# Altium PCB PCB_BoargV1_3.PcbDoc
Units mm, origin at the board's own origin, x right, y up, seen from the top; angles counter-clockwise.
Board outline 84.07 x 53 mm, 2 copper layers (Top Layer, Bottom Layer); 53 components, 52 nets, 250 pads, 38 vias.
Unrouted connection lines stored in the file: 1.
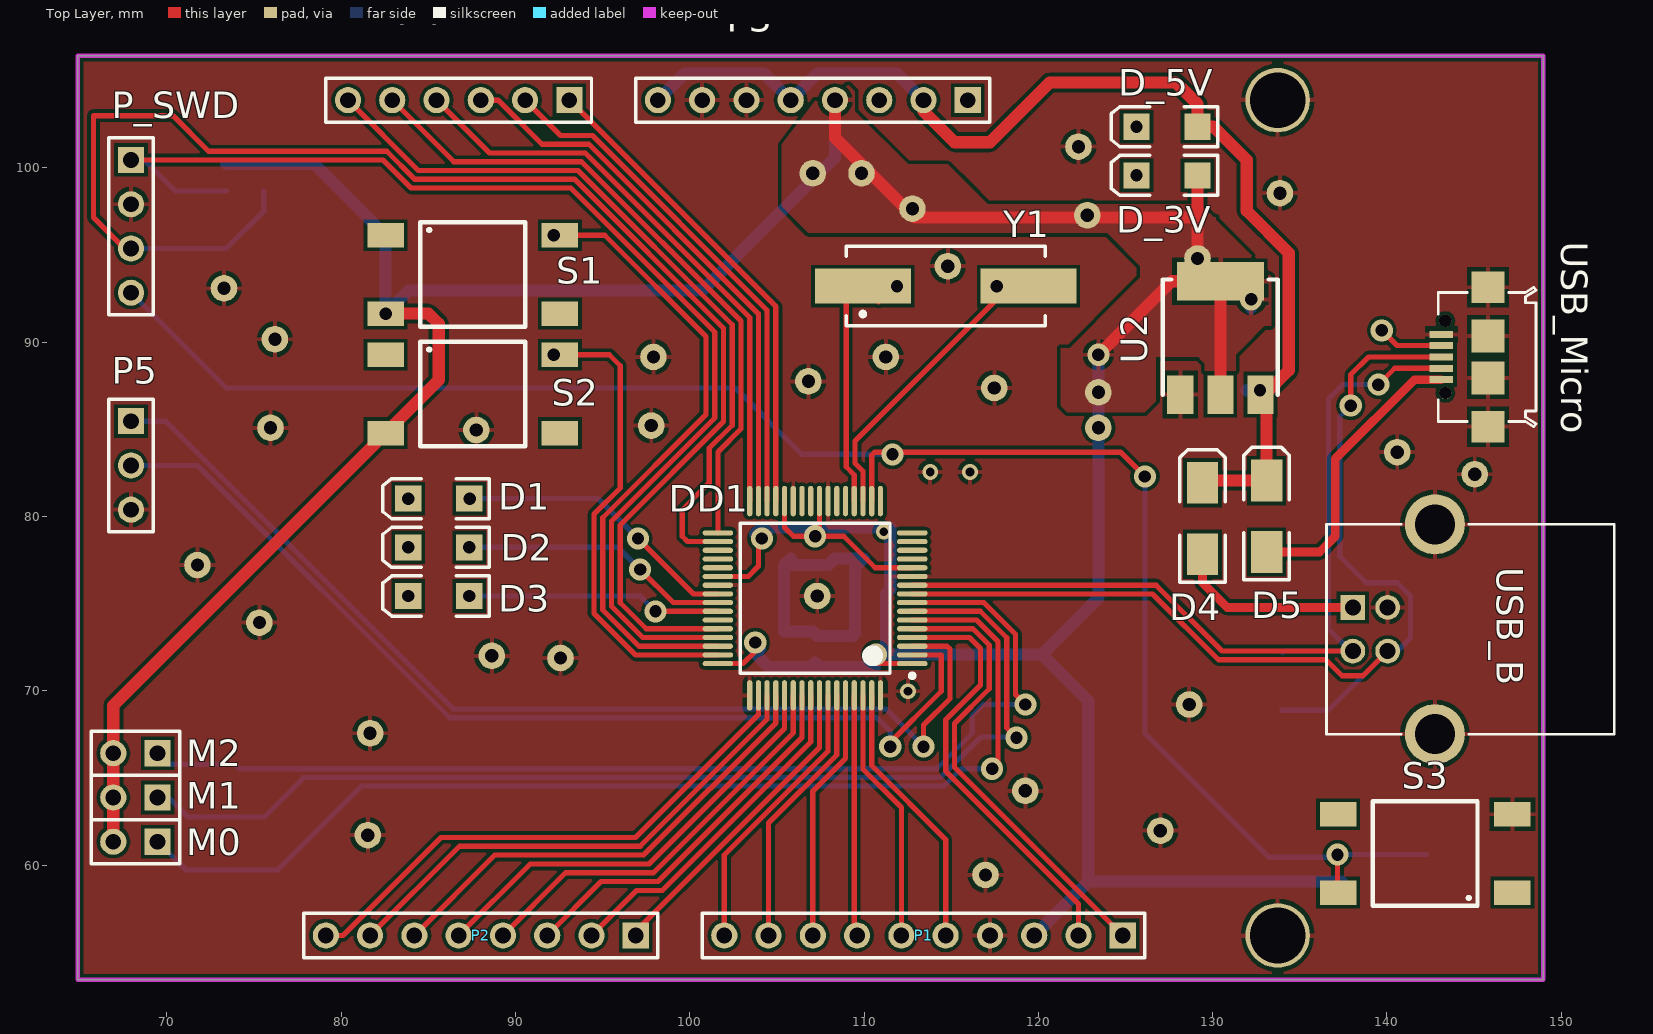
[diagram p0: Top Layer view]
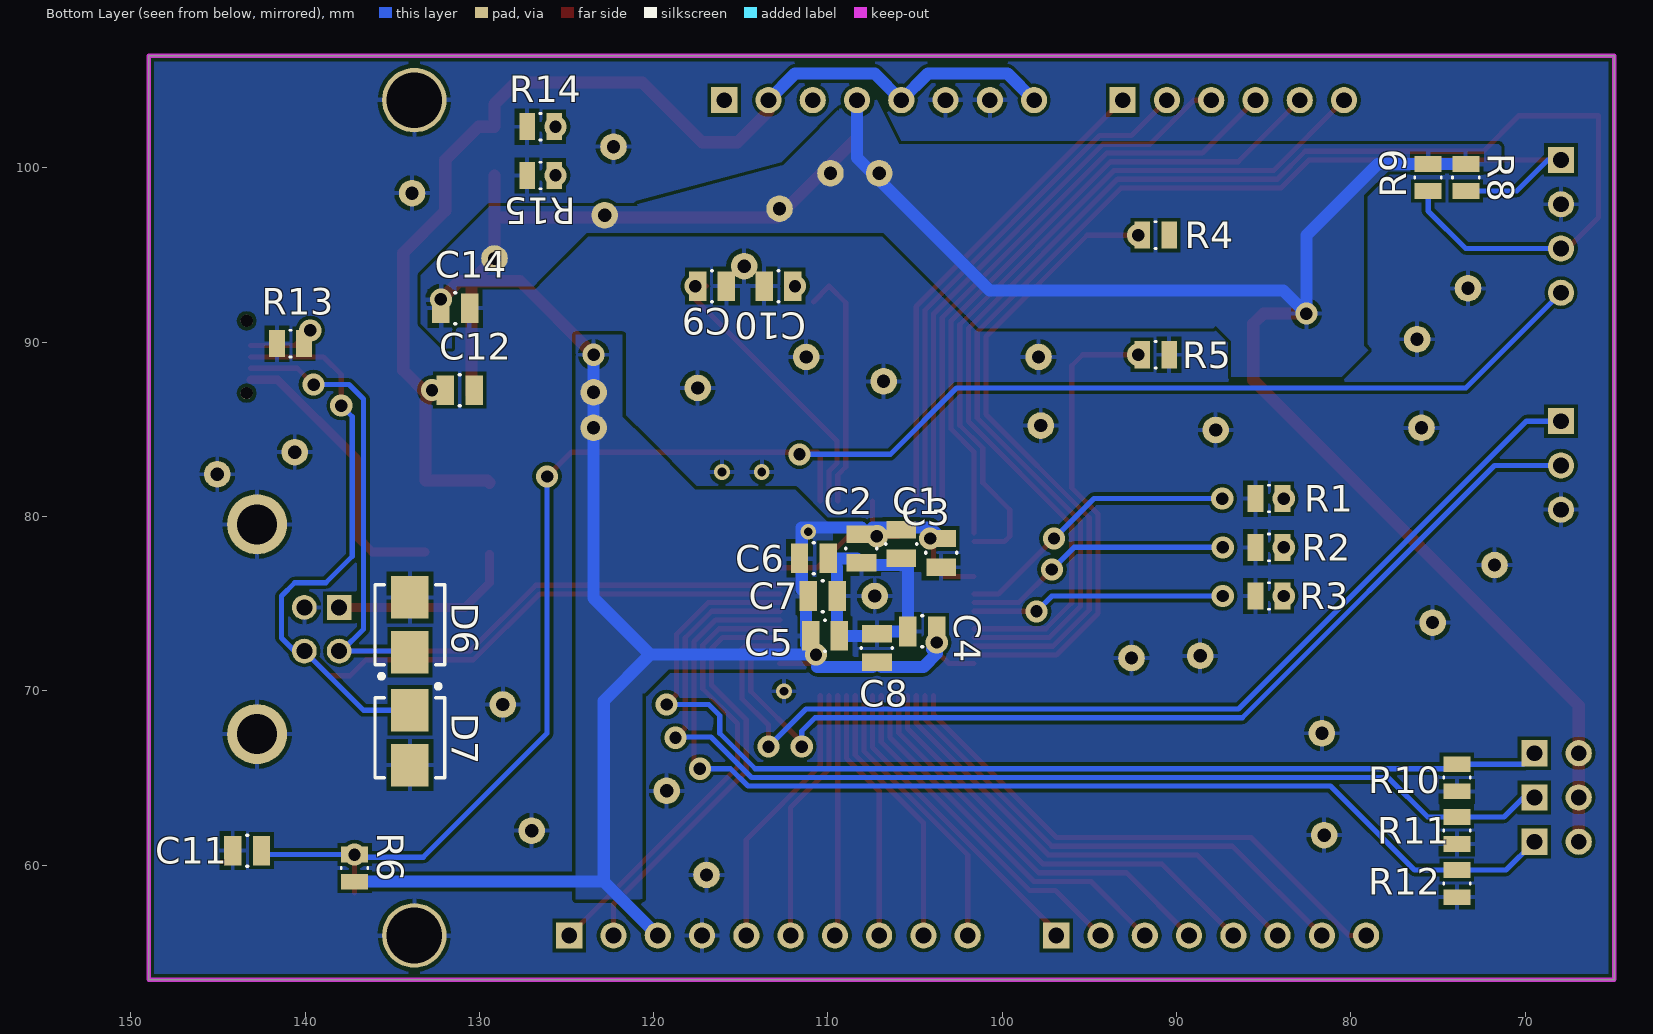
[diagram p1: Bottom Layer view, seen from below]
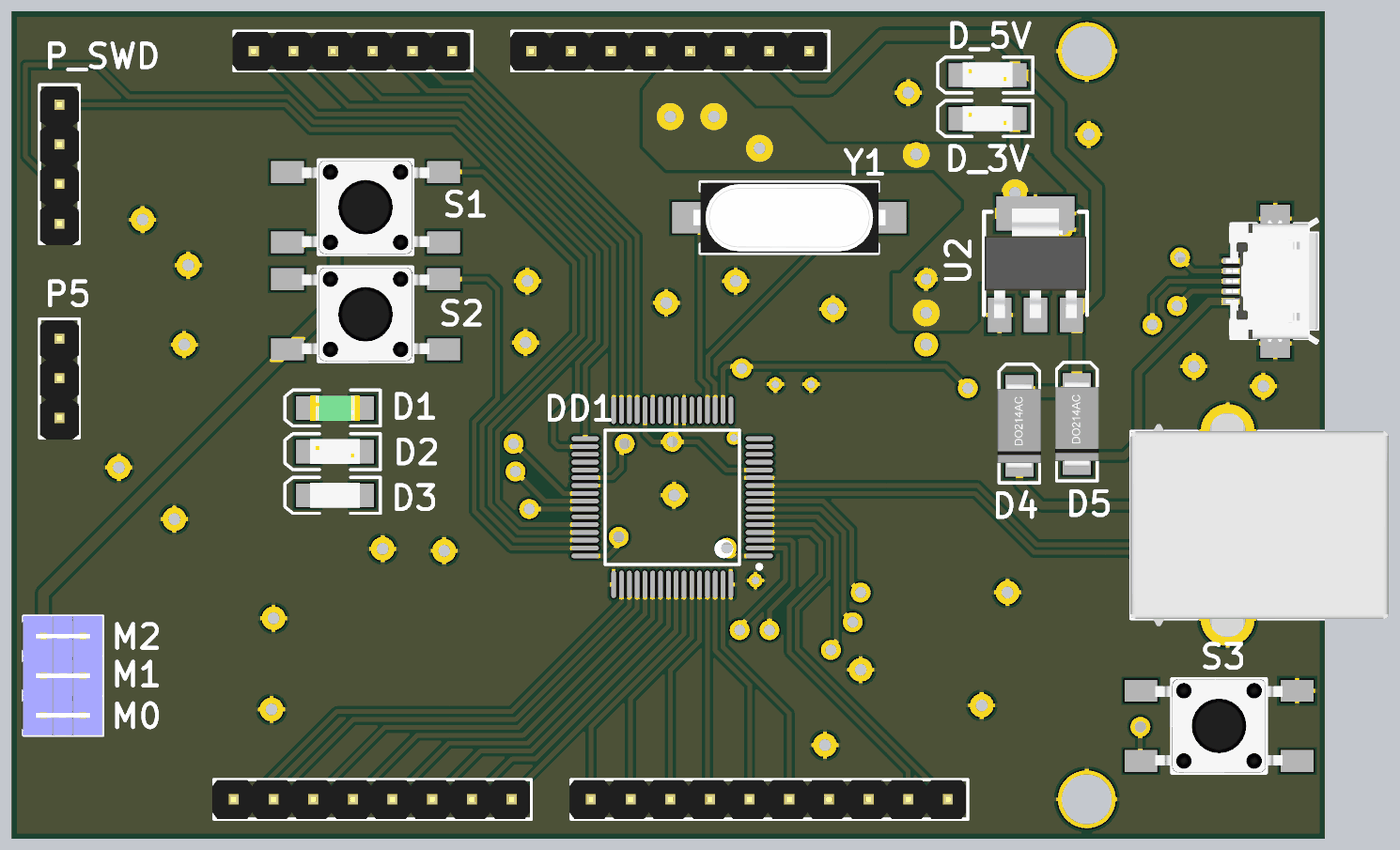
[diagram p2: 3D render of the assembled board from above, using the file's embedded part models]
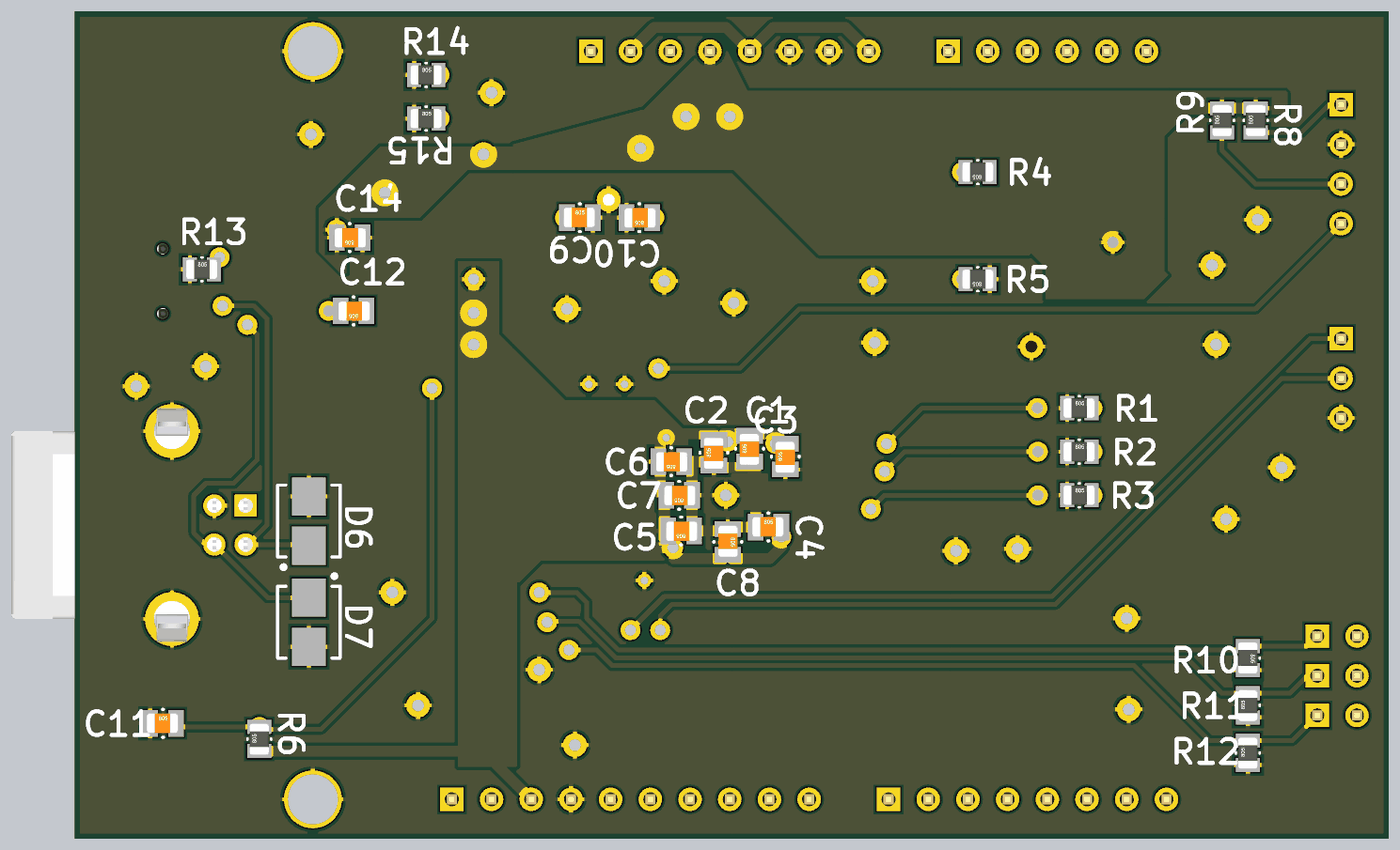
[diagram p3: 3D render of the assembled board from below, using the file's embedded part models]

## Layer stack, top to bottom
Top Solder: solder mask 0.0102, Solder Resist, Dk 3.5
Top Layer: signal copper 0.0356
Dielectric 1: dielectric 0.32, FR-4, Dk 4.8
Bottom Layer: signal copper 0.0356
Bottom Solder: solder mask 0.0102, Solder Resist, Dk 3.5

## Board outline
64.897,53.426 64.897,106.426 148.971,106.426 148.971,53.426

## Design rules (kind name [scope] priority, off if disabled: settings)
Clearance [All] p1: gap=0.2
PolygonConnect [All] p1: connectstyle=Relief reliefconductorwidth=0.254 reliefentries=4 polygonreliefangle="90 Angle" airgapwidth=0.254
RoutingVias [All] p1: holewidth=0.711 width=1.27 viastyle="Through Hole" minholewidth=0.711 minwidth=1.27 maxholewidth=0.711 maxwidth=1.27
SolderMaskExpansion [All] p1: expansion=0.102
Width Width_GND [InNet('GND')] p1: maxlimit=0.9 minlimit=0.254 preferedwidth=0.5
Width Width_3V [InNet('3.3V')] p2: maxlimit=0.7 minlimit=0.3 preferedwidth=0.5
Width Width_5V [InNet('5V')] p3: maxlimit=0.9 minlimit=0.4 preferedwidth=0.5
Width [All] p4: maxlimit=0.5 minlimit=0.3 preferedwidth=0.4
29 further rules are at their usual default settings.

## Components (designator, comment, footprint, x,y, rotation, side; value= is the part's Value field where it differs from the comment)
C1 "CAP" C0805C 105.791,77.597 r90 bottom
C2 "CAP" C0805C 108.077,77.343 r90 bottom
C3 "CAP" C0805C 103.505,77.089 r90 bottom
C4 "CAP" C0805C 105.41,73.406 r180 bottom
C5 "CAP" C0805C 109.347,73.152 r0 bottom
C6 "CAP" C0805C 109.982,77.597 r0 bottom
C7 "CAP" C0805C 109.474,75.438 r0 bottom
C8 "CAP" C0805C 107.188,73.279 r270 bottom
C9 "CAP" C0805C 117.475,93.218 r180 bottom
C10 "CAP" C0805C 112.014,93.218 r0 bottom
C11 "CAP" C0805C 144.145,60.833 r180 bottom
C12 "CAP" C0805C 130.302,87.249 r0 bottom
C14 "CAP" C0805C 130.556,91.948 r0 bottom
D1 "LED" LED1206G 85.598,81.026 r180 top
D2 "LED" LED1206R 85.598,78.232 r180 top
D3 "LED" LED1206Y 85.598,75.438 r180 top
D4 "Diode" DSO-C2/X1.8 129.413,79.883 r90 top
D5 "Diode" DSO-C2/X1.8 133.096,80.01 r90 top
D6 "DiodeTVS" DIOM4336X22N 133.985,73.787 r90 bottom
D7 "DiodeTVS" DIOM4336X22N 133.985,67.31 r270 bottom
D_3V "LED" LED1206R 127.381,99.568 r180 top
D_5V "LED" LED1206R 127.381,102.362 r180 top
DD1 "К1986ВЕ92Q" TSQFP50P1200X1200X160-64N 107.188,75.311 r180 top
M0 "Header 2" HDR1X2J 69.469,61.341 r180 top
M1 "Header 2" HDR1X2J 69.469,63.881 r180 top
M2 "Header 2" HDR1X2J 69.469,66.421 r180 top
P1 "Header 10" HDR1X10 124.841,55.966 r180 top
P2 "Header 8" HDR1X8 96.901,55.966 r180 top
P3 "Header 8" HDR1X8 115.95,103.886 r180 top
P4 "Header 6" HDR1X6 93.093,103.886 r180 top
P5 "Header 3" HDR1X3 67.945,85.471 r270 top
P_SWD "Header 4" HDR1X4 67.945,100.457 r270 top
R1 "RES" C0805R 85.471,81.026 r180 bottom
R2 "RES" C0805R 85.471,78.232 r180 bottom
R3 "RES" C0805R 85.471,75.438 r180 bottom
R4 "RES" C0805R 90.424,96.139 r0 bottom
R5 "RES" C0805R 90.424,89.281 r0 bottom
R6 "RES" C0805R 137.16,59.055 r90 bottom
R8 "RES" C0805R 73.406,98.679 r90 bottom
R9 "RES" C0805R 75.565,98.679 r90 bottom
R10 "RES" C0805R 73.914,65.786 r270 bottom
R11 "RES" C0805R 73.914,61.214 r90 bottom
R12 "RES" C0805R 73.914,58.166 r90 bottom
R13 "RES" C0805R 141.605,89.916 r180 bottom
R14 "RES" C0805R 127.254,102.362 r180 bottom
R15 "RES" C0805R 127.254,99.568 r180 bottom
S1 "SPST-NO" SPST-NO 82.55,96.139 r270 top
S2 "SPST-NO" SPST-NO 82.55,89.281 r270 top
S3 "SPST-NO" SPST-NO 147.193,58.42 r90 top
U2 "LM1117-3.3" SOT-223 128.143,86.995 r0 top
USB_B "USB 2.0 Type B" 61400416121 144.78,73.533 r90 top
USB_Micro "Micro USB 2.0 Type B" 629105136821 145.796,89.154 r90 top
Y1 "XTAL" "HC49SMD C" 114.681,93.218 r0 top

## Footprints (in the part's own frame and the unit in brackets; to place one, negate y for a bottom-side part, rotate by r counter-clockwise, add the part's x,y. Pads: shape width x height; smd on the part's side, far side on the other; paste and mask are expansions set on the pad)
61400416121 [mm] "USB 2.0 Type B Horizontal"
  rect 1.42x1.42 hole 0.92: 1(1.25,6.74)
  round 1.42 hole 0.92: 2(-1.25,6.74) 3(-1.25,4.74) 4(1.25,4.74)
  round 3.45 hole 2.3: S1(-6.02,2.03) S2(6.02,2.03)
  silkscreen extent -6.02,-8.25 6.02,8.25, body extent -7.48,-8.25 7.48,8.25, height 11.1
629105136821 [mm] "Micro USB 2.0 SMT Type B Horizontal 5 Contacts"
  rect 0.4x1.35 smd: 1(-1.3,2.675) 2(-0.65,2.675) 3(0,2.675) 4(0.65,2.675) 5(1.3,2.675)
  round 0.7 hole 0.7 unplated: M1(-2.075,2.45) M2(2.075,2.45)
  rect 1.8x1.9 smd: S1(-4,0) S4(4,0)
  rect 1.9x1.9 smd: S2(-1.2,0) S3(1.2,0)
  silkscreen extent -4,-2.75 4,2.85, body extent -4,-2.73 4,3.17, height 2.77
C0805C [mm]
  rect 1x1.7 smd: 1(0,0) 2(1.65,0)
  silkscreen extent 0.8,-0.89 0.85,0.89, body extent -0.21,-0.61 1.79,0.64, height 0.78
C0805R [mm]
  rect 0.9x1.55 smd: 1(0,0) 2(1.55,0)
  silkscreen extent 0.73,-0.76 0.81,0.76, body extent -0.24,-0.62 1.76,0.63, height 0.78
DIOM4336X22N [mm] "Molded Diode, 2-Leads, Body 4,31x3,62mm, IPC Medium Density"
  rect 2.45x2.15 smd: A(1.575,0) K(-1.575,0)
  silkscreen extent -3.07,-2 2.3,2, body extent -2.29,-1.97 2.28,1.97, height 2.25
DSO-C2/X1.8 [mm] "Diode; DO-214-AC/SMA; 2 C-Bend Leads; Body 5 x 2.7 mm, inc. leads (LxW)"
  rect 2.4x1.8 smd: A(-2.05,0) K(2.05,0)
  silkscreen extent -3.65,-1.3 3.95,1.3, body extent -2.74,-1.4 2.74,1.4, height 2.28
"HC49SMD C" [mm] "Quartz Crystal, SMD thickness C; Body 13.4 (inc. leads) x 4.9 mm (LxW max)"
  rect 5.5x2 smd: 1(-4.75,0) 2(4.75,0)
  silkscreen extent -5.7,-2.29 5.7,2.29, body extent -6.15,-2.25 6.15,2.25, height 3.6
HDR1X2J [mm] "Jumper; Connector; Header; 2 Position"
  rect 1.5x1.5 hole 0.9: 1(0,0)
  round 1.5 hole 0.9: 2(2.54,0)
  silkscreen extent -1.27,-1.27 3.81,1.27, body extent -1.24,-1.27 3.91,1.27, height 8.55
HDR1X3 [mm] "Connector; Header; 3 Position"
  rect 1.5x1.5 hole 0.9: 1(0,0)
  round 1.5 hole 0.9: 2(2.54,0) 3(5.08,0)
  silkscreen extent -1.27,-1.27 6.35,1.27, body extent -1.17,-1.25 6.45,1.25, height 8.2
HDR1X4 [mm] "Connector; Header; 4 Position"
  rect 1.5x1.5 hole 0.9: 1(0,0)
  round 1.5 hole 0.9: 2(2.54,0) 3(5.08,0) 4(7.62,0)
  silkscreen extent -1.27,-1.27 8.89,1.27, body extent -1.17,-1.25 8.99,1.25, height 8.2
HDR1X6 [mm] "Connector; Header; 6 Position"
  rect 1.5x1.5 hole 0.9: 1(0,0)
  round 1.5 hole 0.9: 2(2.54,0) 3(5.08,0) 4(7.62,0) 5(10.16,0) 6(12.7,0)
  silkscreen extent -1.27,-1.27 13.97,1.27, body extent -1.17,-1.25 14.07,1.25, height 8.2
HDR1X8 [mm] "Connector; Header; 8 Position"
  rect 1.5x1.5 hole 0.9: 1(0,0)
  round 1.5 hole 0.9: 2(2.54,0) 3(5.08,0) 4(7.62,0) 5(10.16,0) 6(12.7,0) 7(15.24,0) 8(17.78,0)
  silkscreen extent -1.27,-1.27 19.05,1.27, body extent -1.17,-1.25 19.15,1.25, height 8.2
HDR1X10 [mm] "Connector; Header; 10 Position"
  rect 1.5x1.5 hole 0.9: 1(0,0)
  round 1.5 hole 0.9: 2(2.54,0) 3(5.08,0) 4(7.62,0) 5(10.16,0) 6(12.7,0) 7(15.24,0) 8(17.78,0) 9(20.32,0) 10(22.86,0)
  silkscreen extent -1.27,-1.27 24.13,1.27, body extent -1.17,-1.25 24.23,1.25, height 8.2
LED1206G [mm] "SMT LED; 2 Flat Leads; 3.2X1.6X1.1"
  rect 1.5x1.5 smd: 1(-1.75,0) 2(1.75,0)
  silkscreen extent -2.9,-1.15 3.2,1.15, body extent -1.6,-0.8 1.6,0.8, height 1.11
LED1206R [mm] "SMT LED; 2 Flat Leads; 3.2X1.6X1.1"
  rect 1.5x1.5 smd: 1(-1.75,0) 2(1.75,0)
  silkscreen extent -2.9,-1.15 3.2,1.15, body extent -1.6,-0.8 1.6,0.8, height 1.11
LED1206Y [mm] "SMT LED; 2 Flat Leads; 3.2X1.6X1.1"
  rect 1.5x1.5 smd: 1(-1.75,0) 2(1.75,0)
  silkscreen extent -2.9,-1.15 3.2,1.15, body extent -1.6,-0.8 1.6,0.8, height 1.11
SOT-223 [mm] "Surface mounted, 4 pin package"
  rect 1.5x2.2 smd: 1(0,0) 2(2.3,0) 3(4.6,0)
  rect 5x2.2 smd: 4(2.3,6.5)
  silkscreen extent -1,0 5.6,6.6, body extent -0.95,-0.2 5.55,6.8, height 1.64
SPST-NO [mm] "Tactile Switch SPST-NO 6x6mm"
  rect 1.4x2.1 smd: 1(0,0) 2(4.5,0) 3(4.5,10) 4(0,10)
  silkscreen extent -0.75,2 5.25,8, body extent -0.75,0.93 5.25,9.08, height 5
TSQFP50P1200X1200X160-64N [mm] "TSQFP, 64-Leads, Body 10,00x10,00mm, Pitch 0,50mm, IPC Medium Density"
  oval 1.75x0.3 smd: 1(-5.575,3.75) 2(-5.575,3.25) 3(-5.575,2.75) 4(-5.575,2.25) 5(-5.575,1.75) 6(-5.575,1.25) 7(-5.575,0.75) 8(-5.575,0.25) 9(-5.575,-0.25) 10(-5.575,-0.75) 11(-5.575,-1.25) 12(-5.575,-1.75) 13(-5.575,-2.25) 14(-5.575,-2.75) 15(-5.575,-3.25) 16(-5.575,-3.75) 33(5.575,-3.75) 34(5.575,-3.25) 35(5.575,-2.75) 36(5.575,-2.25) 37(5.575,-1.75) 38(5.575,-1.25) 39(5.575,-0.75) 40(5.575,-0.25) 41(5.575,0.25) 42(5.575,0.75) 43(5.575,1.25) 44(5.575,1.75) 45(5.575,2.25) 46(5.575,2.75) 47(5.575,3.25) 48(5.575,3.75)
  oval 0.3x1.75 smd: 17(-3.75,-5.575) 18(-3.25,-5.575) 19(-2.75,-5.575) 20(-2.25,-5.575) 21(-1.75,-5.575) 22(-1.25,-5.575) 23(-0.75,-5.575) 24(-0.25,-5.575) 25(0.25,-5.575) 26(0.75,-5.575) 27(1.25,-5.575) 28(1.75,-5.575) 29(2.25,-5.575) 30(2.75,-5.575) 31(3.25,-5.575) 32(3.75,-5.575) 49(3.75,5.575) 50(3.25,5.575) 51(2.75,5.575) 52(2.25,5.575) 53(1.75,5.575) 54(1.25,5.575) 55(0.75,5.575) 56(0.25,5.575) 57(-0.25,5.575) 58(-0.75,5.575) 59(-1.25,5.575) 60(-1.75,5.575) 61(-2.25,5.575) 62(-2.75,5.575) 63(-3.25,5.575) 64(-3.75,5.575)
  silkscreen extent -5.7,-4.3 4.3,4.57, body extent -5,-5 5,5, height 1.6

## Part data
C1 C2 C3 C4 C5 C6 C7 C8 C9 C10 C11 C12 C14: "Capacitor"
D1 D2 D3 D_3V D_5V: "Typical LED"
D4 D5: "Default Diode"
D6 D7: "Diode TVS"
M0 M1 M2: "Header, 2-Pin"
P1: "Header, 10-Pin"
P2 P3: "Header, 8-Pin"
P4: "Header, 6-Pin"
P5: "Header, 3-Pin"
P_SWD: "Header, 4-Pin"
R1 R2 R3 R4 R5 R6 R8 R9 R10 R11 R12 R13 R14 R15: "Resistor"
S1 S2 S3: "Tactile Switch 7.3mm, SMD"
U2: "500 mA Low Dropout Regulator"
USB_B: library part 61400416121, "USB 2.0 Type B Horizontal THT WR-COM"
USB_Micro: library part 629105136821, "Micro USB 2.0 Type B Horizontal SMT 5 Contacts WR-COM"
Y1: "Crystal Oscillator"

## Free pads (board coordinates)
  round 1.524 hole 0.762: 0(107.315,75.438) 1(88.646,72.009) 1(123.444,87.122) 2(92.583,71.882) 2(123.444,85.09) 3(71.755,77.216) 3(129.131,94.807) 4(75.311,73.914) 4(122.809,97.282) 5(76.2,90.17) 5(112.776,97.663) 6(75.946,85.09) 6(107.061,99.695) 7(81.534,61.722) 7(109.855,99.695) 8(81.661,67.564) 9(116.967,59.436) 10(119.253,64.262) 11(127,61.976) 12(128.651,69.215) 13(140.589,83.693) 14(145.034,82.423) 16(122.301,101.219) 17(133.858,98.552) 18(117.475,87.376) 19(106.807,87.757) 20(111.252,89.154) 21(114.808,94.361) 22(97.917,89.154) 23(97.79,85.217) 24(87.757,84.963) 25(73.279,93.091)
  round 3.7 hole 3.2: 0(133.731,55.966) 0(133.731,103.886)

## Via types
v1: diameter 1.27, hole 0.711, Top Layer to Bottom Layer, 34 vias
v2: diameter 0.9, hole 0.5, Top Layer to Bottom Layer, 4 vias

## Nets (pads, with @x,y where several pads share a name; then routed paths per layer and width w, separated by ;. In a path a pad name is that pad's centre, name@x,y a point inside that pad or via, vN(x,y) a via of type N, cw(c..) or ccw(c..) an arc to the next point about the centre after c; other vN are vias at no path point)
3.3V: C1.2 C2.2 C3.2 C4.2 C5.2 C6.2 C7.2 C8.2 C14.2 D_3V.1 DD1.1 DD1.12 DD1.24 DD1.28 DD1.38 DD1.48 M0.2 M1.2 M2.2 P1.3 P3.4 pad.1@123.444,87.122 pad.2@123.444,85.09 pad.3@129.131,94.807 pad.4@122.809,97.282 pad.5@112.776,97.663 pad.6@107.061,99.695 pad.7@109.855,99.695 R6.1 R8.2 R9.2 S1.2 S2.2 U2.2 U2.4 | length 243.4
  Top Layer w0.3: DD1.48 103.057,71.561 v1@103.759,72.263 ; DD1.38 103.358,76.561 103.95,77.153 103.95,78.549 v1(104.14,78.74) ; DD1.28 105.438,79.375 105.946,78.867 v1(107.188,78.867) ; DD1.24 107.438,79.125 107.184,78.871 108.835,78.871 110.645,77.061 DD1.12 ; v1(110.684,72.077) 110.684,71.561 DD1.1
  Top Layer w0.7: M0.2 M1.2 M2.2 66.929,69.16 S2.2 85.598,87.829 85.598,91.059 85.018,91.639 v1(82.55,91.639) ; P3.4 108.33,101.728 112.903,97.155 129.098,97.155 129.131,97.188 ; v1(123.444,89.281) 127.658,93.495 U2.4 ; D_3V.1 129.131,97.188 ; U2.2 U2.4 ; v1(132.206,92.455) 131.166,93.495 U2.4 ; 129.131,97.188 129.131,94.807 U2.4
  Bottom Layer w0.7: R8.2 R9.2 78.46,100.229 82.55,96.139 v1(82.55,91.639) 83.875,92.964 100.711,92.964 108.33,100.583 P3.4 ; C3.2@103.759,78.994 104.14,79.375 C1.2@105.283,79.375 ; v1@104.013,72.39 103.759,72.136 104.521,71.374 106.933,71.374 C8.2 107.443,71.374 110.617,71.374 ; C1.2@105.156,79.374 C2.2@107.438,79.374 ; C2.2@108.077,79.374 111.505,79.374 111.505,75.819 111.252,75.566 111.252,72.645 v1(110.684,72.077) 120.201,72.077 ; P1.3@119.761,55.956 122.86,59.055 ; v1(123.444,89.281) 123.444,75.32 120.201,72.077 ; C14.2 v1(132.206,92.455) ; R6.1@137.414,59.055 R6.1 122.86,59.055 ; 120.201,72.077 122.86,69.418 122.86,59.055
  other v1: 103.76,72.771
  other v2: 111.125,79.121
5V: C12.2 D4.K D5.K D_5V.1 P3.2 P3.5 P3.8 U2.3 | length 66.6
  Top Layer w0.7: P3.2 113.41,103.252 115.189,101.473 117.221,101.473 120.65,104.902 127.889,104.902 129.131,103.66 D_5V.1 130.048,102.362 131.953,100.457 131.953,97.536 134.366,95.123 134.366,88.392 132.969,86.995 U2.3 133.096,86.642 D5.K 129.54,82.06 D4.K ; v1(132.715,87.249) U2.3@132.743,87.221
  Bottom Layer w0.7: P3.8 99.694,105.41 104.266,105.41 P3.5 107.314,105.41 111.886,105.41 P3.2 ; C12.2 v1(132.715,87.249)
GND: C1.1 C2.1 C3.1 C4.1 C5.1 C6.1 C7.1 C8.1 C9.2 C10.2 C11.1 C14.1 D6.A D7.A DD1.11 DD1.23 DD1.27 DD1.39 DD1.49 DD1.64 P1.4 P3.6 P3.7 P5.3 P_SWD.2 pad.0 pad.1@88.646,72.009 pad.2@92.583,71.882 pad.3@71.755,77.216 pad.4@75.311,73.914 pad.5@76.2,90.17 pad.6@75.946,85.09 pad.7@81.534,61.722 pad.8 pad.9 pad.10 pad.11 pad.12 pad.13 pad.14 pad.16 pad.17 pad.18 pad.19 pad.20 pad.21 pad.22 pad.23 pad.24 pad.25 R1.1 R2.1 R3.1 R4.1 R5.1 R10.2 R11.1 R12.1 R13.1 R14.1 R15.1 S3.2 U2.1 USB_B.4 USB_B.S1 USB_B.S2 USB_Micro.5 USB_Micro.S1 USB_Micro.S2 USB_Micro.S3 USB_Micro.S4 | length 17.8
  Bottom Layer w0.7: C1.1 C1.1@105.41,77.216 ; C1.1@105.41,77.216 107.95,77.216 C2.1 108.331,77.597 C6.1 109.474,77.089 C7.1 109.474,73.279 C5.1 107.315,73.152 C8.1 107.061,73.406 C4.1 105.41,75.819 C1.1@105.41,77.216
  other v2: 112.522,69.977 113.792,82.55 116.078,82.55
NetC9_1: C9.1 DD1.19 Y1.2 | length 16.7
  Top Layer w0.3: DD1.19 109.938,82.594 109.474,83.058 109.474,84.328 117.602,92.456 v1(117.602,93.218) Y1.2@116.967,93.218
  Bottom Layer w0.3: C9.1 v1(117.602,93.218)
NetC10_1: C10.1 DD1.20 Y1.1 | length 14.3
  Top Layer w0.3: DD1.20 109.438,82.387 108.974,82.851 108.974,92.261 Y1.1 Y1.1@110.835,92.314
  Bottom Layer w0.3: v1(111.887,93.218) C10.1
NetD1_2: D1.2 R1.2
  other v1: 83.848,81.026
NetD2_2: D2.2 R2.2
  other v1: 83.848,78.232
NetD3_2: D3.2 R3.2
  other v1: 83.848,75.438
NetD4_A: D4.A USB_B.1 | length 10.8
  Top Layer w0.5: D4.A 129.413,76.2 130.83,74.783 USB_B.1
NetD5_A: D5.A USB_Micro.1 | length 16.7
  Top Layer w0.5: D5.A 136.126,77.96 137.033,78.867 137.033,83.312 141.575,87.854 USB_Micro.1
NetD6_K: D6.K DD1.10 USB_B.2 USB_Micro.2 | length 53.1
  Top Layer w0.3: DD1.10 126.758,76.061 130.536,72.283 USB_B.2 ; v1(139.51,87.566) 140.447,88.504 USB_Micro.2
  Bottom Layer w0.3: D6.K 134.056,72.283 USB_B.2@137.902,72.283 ; USB_B.2 USB_B.2@137.902,72.283 ; v1(139.51,87.566) 137.477,87.566 136.652,86.741 136.652,73.533 USB_B.2@137.902,72.283
NetD7_K: D7.K DD1.9 USB_B.3 USB_Micro.3 | length 62.6
  Top Layer w0.3: DD1.9 126.551,75.561 130.329,71.783 136.497,71.783 137.414,70.866 138.623,70.866 USB_B.3 ; v1(137.922,86.36) 137.922,88.138 138.938,89.154 USB_Micro.3
  Bottom Layer w0.3: D7.K 136.642,68.885 USB_B.3 140.609,72.283 141.351,73.025 141.351,75.438 140.589,76.2 138.811,76.2 137.287,77.724 137.287,85.725 v1(137.922,86.36)
NetD_3V_2: D_3V.2 R15.2
  other v1: 125.631,99.568
NetD_5V_2: D_5V.2 R14.2
  other v1: 125.631,102.362
NetDD1_6: DD1.6 M0.1 R12.2 | length 63.8
  Top Layer w0.3: DD1.6 116.456,74.061 117.682,72.835 117.682,65.866 v1(117.348,65.532)
  Bottom Layer w0.3: M0.1 71.094,59.716 R12.2 76.353,59.716 81.169,64.532 114.587,64.532 115.587,65.532 v1(117.348,65.532)
NetDD1_7: DD1.7 M1.1 R11.2 | length 63.6
  Top Layer w0.3: DD1.7 116.663,74.561 118.182,73.042 118.182,67.873 v1(118.745,67.31)
  Bottom Layer w0.3: M1.1 70.104,63.881 71.221,62.764 R11.2 75.591,62.764 77.859,65.032 114.38,65.032 116.705,67.357 v1@118.698,67.357
NetDD1_8: DD1.8 M2.1 R10.1 | length 63.2
  Top Layer w0.3: DD1.8 116.87,75.061 118.682,73.249 118.682,69.786 v1(119.253,69.215)
  Bottom Layer w0.3: M2.1 70.104,65.786 R10.1 74.168,65.532 114.173,65.532 116.205,67.564 116.205,68.58 116.84,69.215 v1(119.253,69.215)
NetDD1_44: DD1.44 P_SWD.3 R9.1 | length 84
  Top Layer w0.3: P_SWD.3 67.564,95.377 65.786,97.155 65.786,102.997 70.358,102.997 72.398,100.957 82.615,100.957 84.218,99.354 93.382,99.354 101.938,90.798 101.938,85.445 96.012,79.519 96.012,75.057 97.508,73.561 DD1.44
  Bottom Layer w0.3: P_SWD.3 73.406,95.377 75.565,97.536 R9.1
NetDD1_45: DD1.45 P_SWD.1 R8.1 | length 68.8
  Top Layer w0.3: P_SWD.1 82.408,100.457 84.011,98.854 93.175,98.854 101.438,90.591 101.438,85.652 95.512,79.726 95.512,74.85 97.301,73.061 DD1.45
  Bottom Layer w0.3: P_SWD.1 68.707,100.457 70.485,98.679 R8.1
NetR13_2: R13.2 USB_Micro.4 | length 3.8
  Top Layer w0.3: v1(139.7,90.678) 140.574,89.804 USB_Micro.4
PA0: DD1.63 P1.5 | length 15.5
  Top Layer w0.3: DD1.63 110.438,65.711 114.681,61.468 P1.5
PA1: DD1.62 P1.6 | length 14.7
  Top Layer w0.3: DD1.62 109.938,65.504 112.141,63.301 P1.6
PA2: DD1.61 P1.7 | length 13.8
  Top Layer w0.3: DD1.61 109.438,65.915 109.438,56.129 P1.7
PA3: DD1.60 P1.8 | length 14.5
  Top Layer w0.3: P1.8 107.061,64.245 108.938,66.122 DD1.60
PA4: DD1.59 P1.9 | length 15.4
  Top Layer w0.3: P1.9 104.521,62.412 108.438,66.329 DD1.59
PA5: DD1.58 P1.10 | length 16.2
  Top Layer w0.3: P1.10 101.981,60.579 107.938,66.536 DD1.58
PA6: DD1.57 P2.1 | length 17.9
  Top Layer w0.3: P2.1@96.865,56.17 107.438,66.743 DD1.57
PA7: DD1.56 P2.2 | length 19.8
  Top Layer w0.3: P2.2 96.942,58.547 98.425,58.547 106.938,67.06 DD1.56
PB3: DD1.46 R4.2 S1.4 | length 36.7
  Top Layer w0.3: v1(92.202,96.139) S1.4 95.123,96.139 100.938,90.324 100.938,85.859 95.012,79.933 95.012,74.643 97.094,72.561 DD1.46
PB4: DD1.47 R5.2 S2.4 | length 27.3
  Top Layer w0.3: S2.4 v1(92.202,89.281) 95.377,89.281 96.012,88.646 96.012,81.641 94.512,80.141 94.512,74.436 96.887,72.061 DD1.47
PB5: DD1.50 P2.8 | length 31.2
  Top Layer w0.3: P2.8 80.105,55.966 85.726,61.587 96.893,61.587 103.938,68.632 DD1.50
PB6: DD1.51 P2.7 | length 29.3
  Top Layer w0.3: P2.7 86.782,61.087 97.155,61.087 104.438,68.37 DD1.51
PB7: DD1.52 P2.6 | length 27.4
  Top Layer w0.3: P2.6 88.814,60.579 97.354,60.579 104.938,68.163 104.938,68.326 DD1.52
PB8: DD1.53 P2.5 | length 25.5
  Top Layer w0.3: P2.5 90.846,60.071 97.663,60.071 105.438,67.846 DD1.53
PB9: DD1.54 P2.4 | length 23.6
  Top Layer w0.3: P2.4 92.878,59.563 97.917,59.563 105.938,67.584 DD1.54
PB10: DD1.55 P2.3 | length 21.7
  Top Layer w0.3: P2.3 94.91,59.055 98.171,59.055 106.438,67.322 DD1.55
PC0: D3.1 DD1.42 | length 14.6
  Top Layer w0.3: v1(98.032,74.561) DD1.42
  Bottom Layer w0.3: v1(87.348,75.438) 97.155,75.438 v1(98.032,74.561)
PC1: D2.1 DD1.41 | length 15.6
  Top Layer w0.3: v1(97.155,76.962) 99.056,75.061 DD1.41
  Bottom Layer w0.3: v1(87.348,78.232) 95.885,78.232 v1(97.155,76.962)
PC2: D1.1 DD1.40 | length 16.5
  Top Layer w0.3: v1(97.028,78.74) 100.207,75.561 DD1.40
  Bottom Layer w0.3: v1(87.376,81.026) 94.742,81.026 v1(97.028,78.74)
PD0: DD1.31 P4.3 | length 31.7
  Top Layer w0.3: P4.3 88.997,103.886 91.529,101.354 94.211,101.354 103.938,91.627 DD1.31
PD1: DD1.32 P4.4 | length 33.7
  Top Layer w0.3: P4.4 88.505,100.854 94.004,100.854 103.438,91.42 DD1.32
PD2: DD1.33 P4.5 | length 38
  Top Layer w0.3: P4.5 86.465,100.354 93.797,100.354 102.938,91.213 102.938,85.031 101.613,83.706 DD1.33
PD3: DD1.34 P4.6 | length 42.9
  Top Layer w0.3: P4.6 84.425,99.854 93.59,99.854 102.438,91.006 102.438,85.238 101.113,83.913 101.113,81.936 99.568,80.391 99.568,78.867 99.874,78.561 DD1.34
PD4: DD1.30 P4.2 | length 29.8
  Top Layer w0.3: P4.2 92.585,101.854 94.418,101.854 104.438,91.834 DD1.30
PD5: DD1.35
PD6: DD1.36
PD7: DD1.29 P4.1 | length 27.9
  Top Layer w0.3: P4.1 104.938,92.041 DD1.29
PF0: DD1.2 P5.2 | length 59
  Top Layer w0.3: v1(111.506,66.802) 111.379,66.929 114.427,69.977 114.427,72.061 DD1.2
  Bottom Layer w0.3: P5.2 71.755,82.931 86.233,68.453 110.744,68.453 111.506,67.691 v1(111.506,66.802)
PF1: DD1.3 P5.1 | length 61.7
  Top Layer w0.3: DD1.3 114.764,72.561 114.927,72.398 114.927,69.549 113.411,68.033 v1(113.411,66.802)
  Bottom Layer w0.3: P5.1 69.922,85.471 86.44,68.953 111.26,68.953 v1(113.411,66.802)
PF2: DD1.4 P1.2 | length 24.6
  Top Layer w0.3: DD1.4 116.042,73.061 116.682,72.421 116.682,70.327 114.681,68.326 114.681,65.395 122.301,57.775 P1.2
PF3: DD1.5 P1.1 | length 26.3
  Top Layer w0.3: DD1.5 116.249,73.561 117.182,72.628 117.182,70.12 115.181,68.119 115.181,65.602 ; 115.205,65.602 P1.1
RESET: C11.2 DD1.18 P_SWD.4 R6.2 S3.4 | length 102.4
  Top Layer w0.3: DD1.18 110.438,83.514 110.617,83.693 124.714,83.693 v1(126.111,82.296) ; S3.4@137.16,58.42 v1(137.16,60.605)
  Bottom Layer w0.3: P_SWD.4 73.406,87.376 102.616,87.376 106.426,83.566 v1(111.633,83.566) ; v1(126.111,82.296) 126.111,67.564 133.223,60.452 R6.2@137.033,60.452 ; v1(137.16,60.605) C11.2@142.267,60.605
pads on no net: C12.1 DD1.13 DD1.14 DD1.15 DD1.16 DD1.17 DD1.21 DD1.22 DD1.25 DD1.26 DD1.37 DD1.43 P3.1 P3.3 S1.1 S1.3 S2.1 S2.3 S3.1 S3.3 USB_Micro.M1 USB_Micro.M2

## Polygon pours and split planes (outlines as drawn)
GND on Bottom Layer "Top Layer-No Net" (solid, pour order 16): 64.897,106.426 64.897,53.426 148.971,53.426 148.971,106.426
3.3V on Bottom Layer "Top Layer-No Net" (solid, pour order 7): 107.442,104.394 107.95,104.902 108.966,104.902 109.347,104.521 109.347,104.14 109.347,98.806 107.823,97.282 101.346,90.805 90.043,90.805 87.884,90.805 87.757,90.932 86.868,90.043 86.868,88.011 80.518,88.011 78.994,89.535 79.248,89.789 79.248,92.964 79.248,98.425 77.851,99.822 71.374,99.822 71.374,101.219 71.501,101.346 76.581,101.346 97.155,101.346 103.886,101.346 105.918,101.346
3.3V on Bottom Layer "Top Layer-No Net" (solid, pour order 8): 109.347,103.38 109.347,103.378 111.506,101.219 114.935,97.79 120.269,97.79 128.397,97.79 129.413,97.79 131.064,96.139 133.35,93.853 133.35,91.567 133.35,91.059 133.096,90.805 131.953,89.662 131.572,89.662 131.572,90.678 131.318,90.932 131.318,93.218 126.873,93.218 126.492,93.599 123.825,96.266 118.11,96.266 106.807,96.266 106.68,96.139
3.3V on Bottom Layer "Top Layer-No Net" (solid, pour order 10): 112.395,100.203 114.808,97.79 121.412,97.79
3.3V on Bottom Layer "Top Layer-No Net" (solid, pour order 11): 124.46,90.424 124.46,58.039 120.777,58.039 120.65,57.912 120.65,69.85 120.523,69.85 119.126,71.247 109.728,71.247 109.728,79.375 111.887,81.534 113.919,81.534 117.602,81.534 120.523,84.455 121.793,85.725 121.793,90.424
GND on Top Layer "Top Layer-No Net" (solid, pour order 14): 64.897,106.426 64.897,53.426 148.971,53.426 148.971,106.426
3.3V on Top Layer "Top Layer-No Net" (solid, pour order 9): 107.315,104.013 107.315,104.267 107.95,104.902 108.077,104.775 109.093,104.775 109.347,104.521 109.474,104.394 109.474,103.251 112.522,100.203 114.046,100.203 114.808,100.203 116.078,98.933 117.094,97.917 120.904,97.917 129.286,97.917 129.413,97.79 130.048,97.155 130.175,97.155 130.175,97.028 133.35,93.853 133.35,90.932 132.969,90.932 131.699,89.662 131.318,89.281 131.318,85.598 129.54,85.598 129.54,88.646 129.54,88.773 129.413,88.9 129.159,89.154 126.746,89.154 126.746,86.614 126.111,85.979 122.174,85.979 121.666,85.979 121.285,86.36 121.285,89.662 121.793,89.662 124.841,92.71 125.857,93.726 125.857,94.234 125.857,94.361 123.952,96.266 111.379,96.266 106.807,96.266 105.283,97.79 105.283,101.346

## Keep-outs
Keep-Out Layer:
  the board outline again, w0.254

## Dimensions
64.897,106.426 to 64.897,53.426 on Keep-Out Layer

## Text inside footprints (layer, text, board x,y; h text height)
USB_Micro: Mechanical 1 "PCB Edge" at 147.896,87.754 h0.76 r90